# Altium PCB SAMV71_Xplained_Ultra.PcbDoc (part 3 of 9)
Units mm, origin at the board's own origin, x right, y up, seen from the top; angles counter-clockwise.
Board outline 90 x 135 mm, 8 copper layers (Top Layer LF-Signals, Ground Plane 1 (GND), Power Plane (VCC), Ground Plane 2 (GND), Signal Layer 1, Signal Layer 2, Ground Plane 3 (GND), Bottom Layer LF-Signals), stack 1.632 mm thick; 483 components, 411 nets, 1994 pads, 1021 vias.
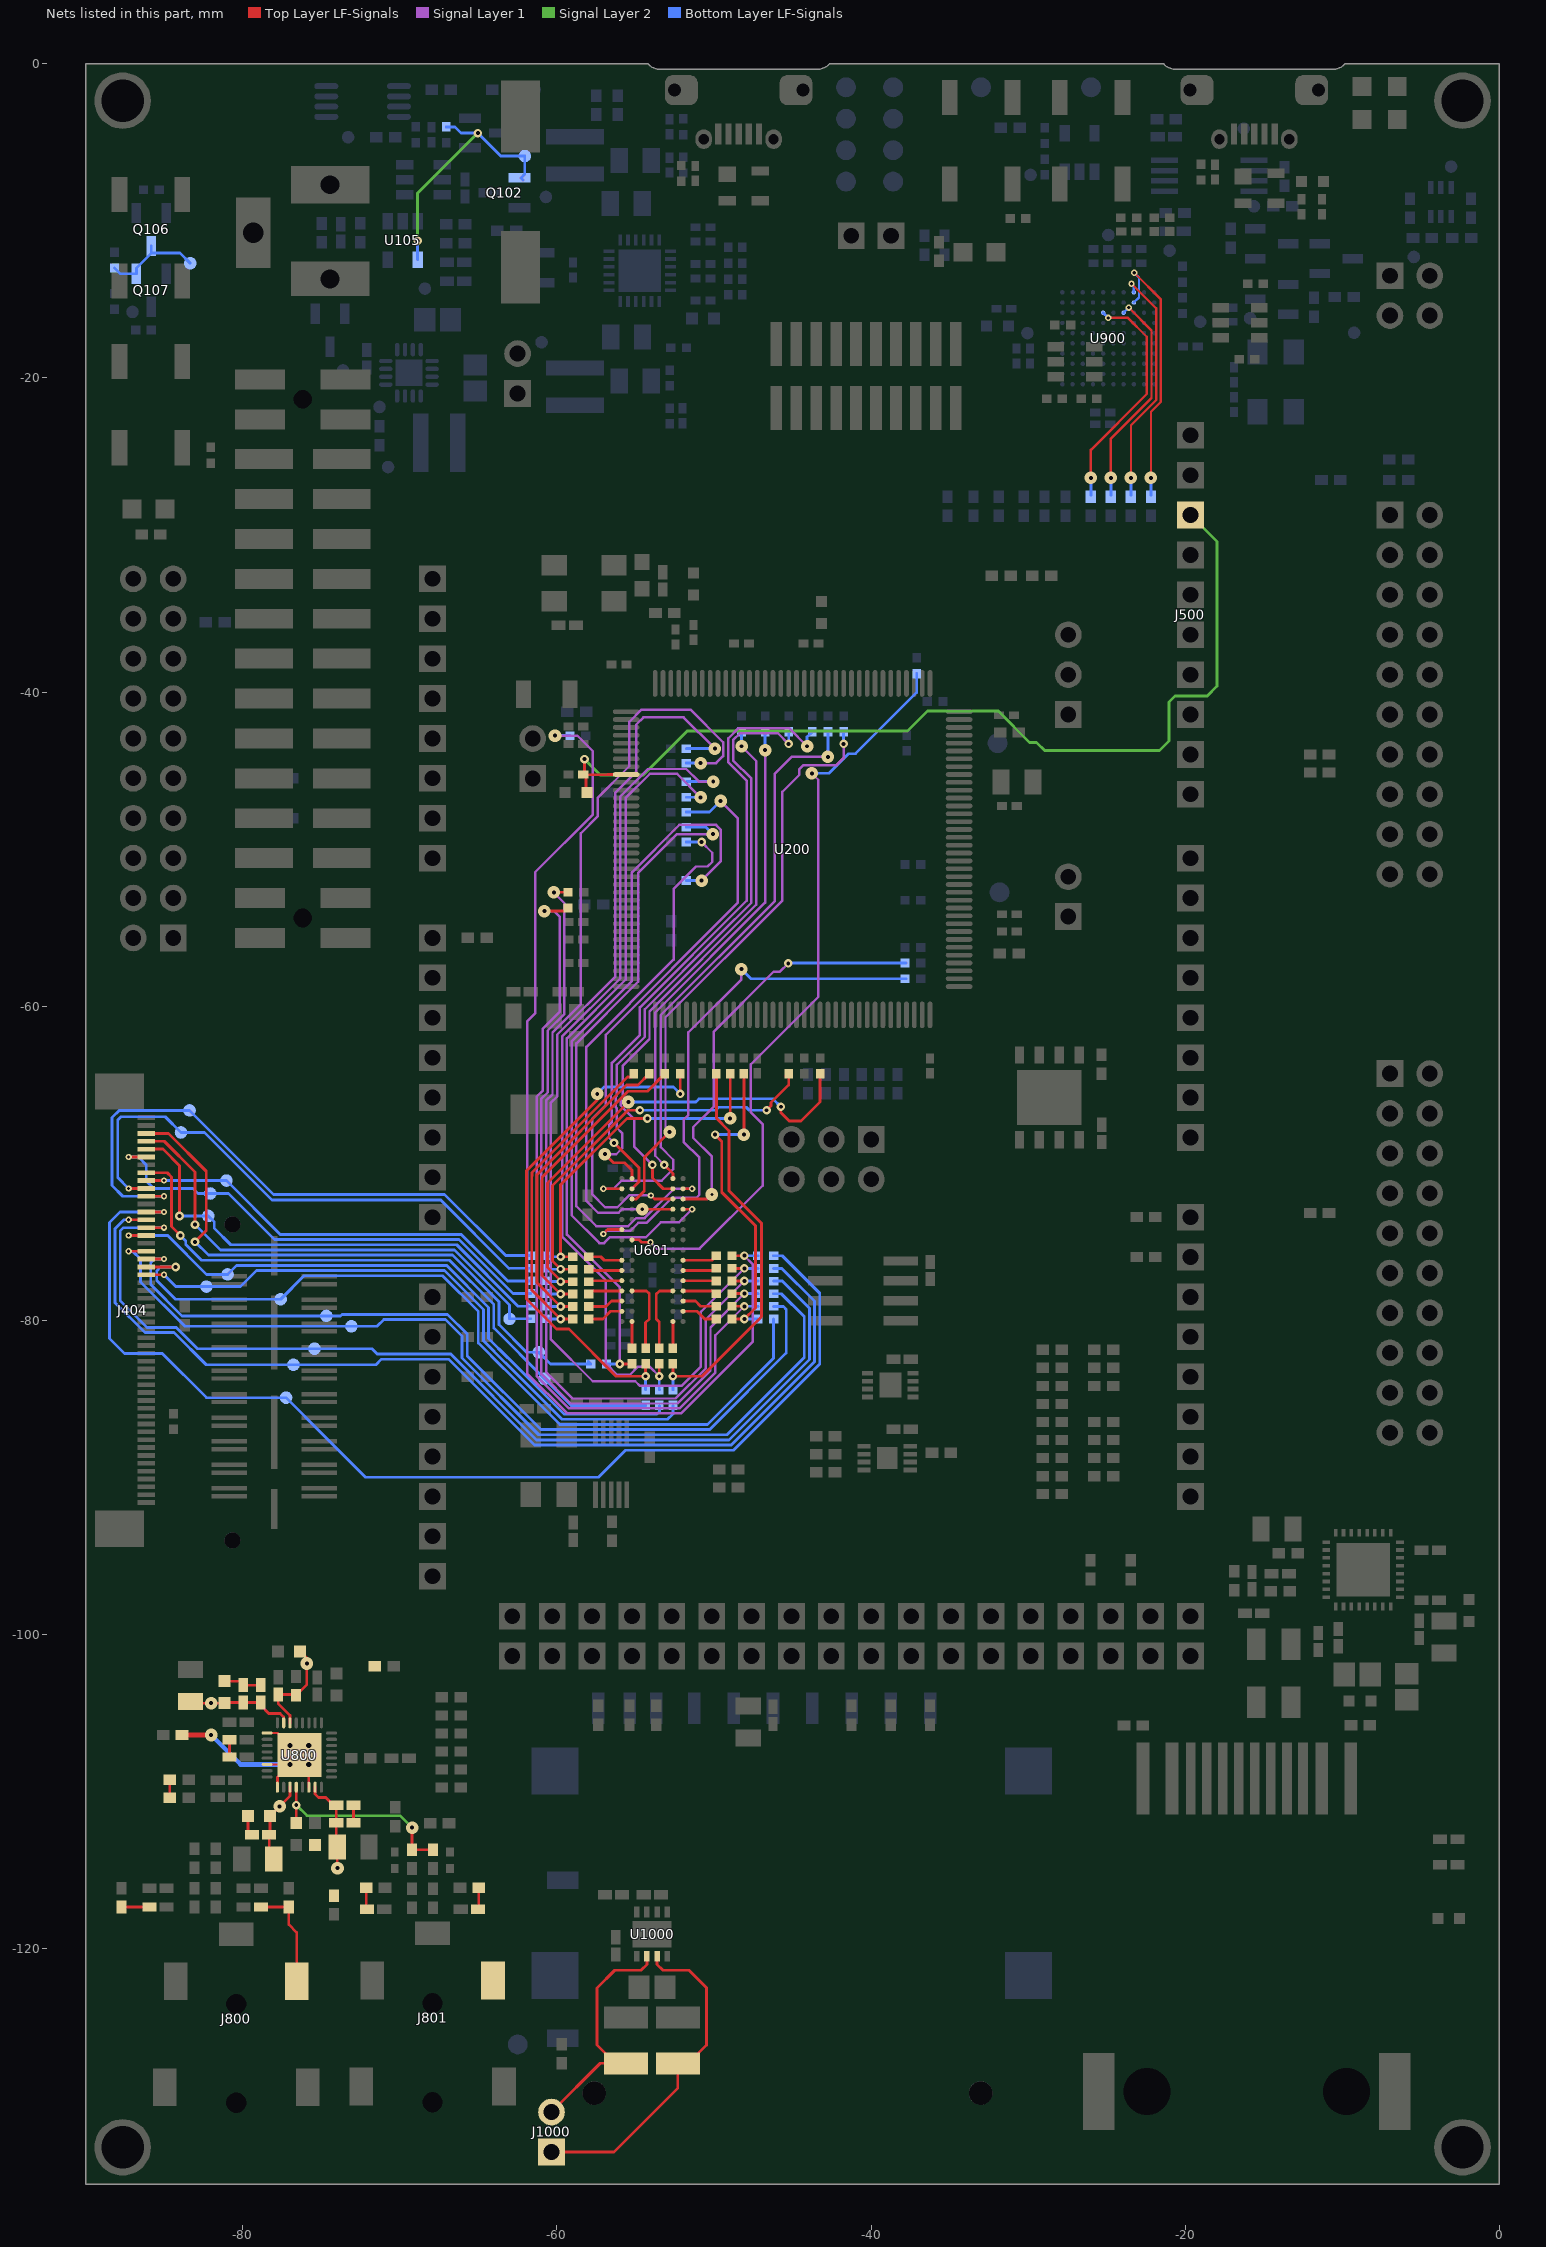
[diagram p9: the nets of this part, all layers, seen from the top]

## Part data (continued)
C219 C902: library part A01-0015, "Ceramic capacitor, SMD 0402, NP0, 50V, +/-5%", Manufacturer=AVX, MPN=04025A100JAT2A, TemperatureRange="-55 - +125 deg C", Tolerance="50V, +/-5%", AN=A01-0015, Height=0,550000011920929, PartGroup="Capacitors,Ceramic,SMD 0402"
C300 C301: library part A01-0011, "Ceramic capacitor, SMD 0402, NP0, 50V, +/-0.25pF", Manufacturer="YAGEO CORP", MPN=CC0402CRNPO9BN4R7, TemperatureRange="-55 - +125 deg C", Tolerance="50V, +/-0.25pF", AN=A01-0011, Height=0,550000011920929, PartGroup="Capacitors,Ceramic,SMD 0402"
C302 C303: library part A01-0016, "Ceramic capacitor, SMD 0402, NP0, 50V, +/-5%", Manufacturer=Kemet, MPN=C0402C120J5GAC7867, TemperatureRange="-55 - +125 deg C", Tolerance="50V, +/-5%", AN=A01-0016, Height=0,550000011920929, PartGroup="Capacitors,Ceramic,SMD 0402"
C304 C903: library part A01-0046, "Ceramic capacitor, SMD 0402, X7R, 25V, +/-10%", Manufacturer=PHYCOMP, MPN="2238 587 15632", TemperatureRange="-55 - +125 deg C", Tolerance="25V, +/-10%", AN=A01-0046, Height=0,550000011920929, PartGroup="Capacitors,Ceramic,SMD 0402"
C704 C709 C800 C900 C901: library part A01-0019, "Ceramic capacitor, SMD 0402, NP0, 50V, +/-5%", Manufacturer="YAGEO CORP", MPN=CC0402JRNPO9BN220, TemperatureRange="-55 - +125 deg C", Tolerance="50V, +/-5%", AN=A01-0019, Height=0,550000011920929, PartGroup="Capacitors,Ceramic,SMD 0402"
C803 C804 C812 C813: library part A01-0034, "Ceramic capacitor, SMD 0402, X7R, 50V, +/-10%", Manufacturer=Murata, MPN=GRM155R71H471KA01D, TemperatureRange="-55 - +125 deg C", Tolerance="50V, +/-10%", AN=A01-0034, Height=0,550000011920929, PartGroup="Capacitors,Ceramic,SMD 0402"
C814 C815: library part A01-0347, "Ceramic capacitor, SMD 0402, X5R, 6.3V, +/-20% (de33687)", Manufacturer=Murata, MPN=GRM155R60J475ME87D, TemperatureRange="-55°C to +85°C", Tolerance=+-20%, AN=A01-0347, Height=0,5, PartGroup="Capacitors,Ceramic,SMD 0402"
C823 C824: library part A01-0022, "Ceramic capacitor, SMD 0402, NP0, 50V, +/-5%", TemperatureRange="-55 - +125 deg C", Tolerance="50V, +/-5%", AN=A01-0022, Height=0,550000011920929, PartGroup="Capacitors,Ceramic,SMD 0402"
C827 C906 C907 C908: library part A01-0321, "Ceramic capacitor, SMD 0402, C0G, 50V, +/-5%", Manufacturer=Murata, MPN=GRM1555C1H102JA01D, Tolerance=5%, AN=A01-0321, Height=0,550000011920929, PartGroup="Capacitors,Ceramic,SMD 0402"
C1000: library part A01-0400, "Ceramic capacitor, SMD 0805, X5R, 25V, ±10 %", Manufacturer=Murata, MPN=GRM21BR61E475KA12L, Tolerance=±10%, AN=A01-0400, Height=1,25, PartGroup="Capacitors,Ceramic,SMD 0805"
D100: library part A04-0064, "Schottky double Diodes, NXP, SOT23-3", Manufacturer=NXP, MPN=BAT54C, AN=A04-0064, Height=1, PartGroup=Diodes,Schottky
D101: library part A04-0001, "Schottky diode, V(rrm)=30V, I(f)=0.1A, V(f)=0.4V (at If = 0.01A), I(r)=0.5uA (at Vrrm), t(rr)=5ns, SMD SOT23", Manufacturer=Philips, MPN=BAT54, TemperatureRange="-40 - +85 deg C", AN=A04-0001, Height=1,10000002384186, NC=2, PartGroup=Diodes,Schottky
D300 D301 D901: library part A10-0019, "LED, Yellow, Wave length=591nm, SMD 0805, ±70°", Manufacturer=Everlight, MPN=17-21UYC/S530-A3/TR8, TemperatureRange="-40 to +85 deg C", AN=A10-0019, Height=1,10000002384186, PartGroup=Opto,LEDs,SMD
D302 D902: library part A06-0236, "Double rail-to-rail USB ESD protection diode", Manufacturer=NXP, MPN=PRTR5V0U2X, TemperatureRange="-40 to +85 C", AN=A06-0236, Height=1,10000002384186, PartGroup="Integrated Circuits,Special function,Protection", PartType=Buy
D900: library part A10-0018, "LED, Green, Wave length=575nm, SMD 0805, ±70°", Manufacturer=Everlight, MPN=EL17-21SYGC, TemperatureRange="-40 - +85 deg C", AN=A10-0018, Height=1,10000002384186, PartGroup=Opto,LEDs,SMD
E1 E2 E3 E4: library part A08-0053, "2.8mm adhesive feet,diam 8.0mm", Manufacturer=3M, MPN=SJ-5076, AN=A08-0053, Height=2,79999995231628, PartGroup="Mechanical devices,Mounting accessories"
J100: library part A08-2120, "Through hole DC jack 2.1mm, 12V, 3A", Manufacturer=Lumberg, MPN="NEB 21 R", TemperatureRange="-20°C to +70°C", AN=A08-2120, Height=11, PartGroup="Mechanical devices,Connectors,Power"
J101: library part A08-1519, "Pin header, 2x2, Right Angle, 2.54mm, THT, Pin In Paste", Manufacturer="Pro-data International Corp", MPN=P101-2*02RGF-139-ND, AN=A08-1519, Height=5,07999992370605, PartGroup="Mechanical devices,Connectors,Pin headers"
J102: library part A08-0764, "1x2 pin header, right angle, 2.54 mm pitch, through-hole", Manufacturer="Pro-data International Corp", MPN=2213R-2G, AN=A08-0764, Height=2,53999996185303, PartGroup="Mechanical devices,Connectors,Pin headers"
J103 J200 J201 J1000: library part A08-1754, "1x2 pin header, 2.54mm pitch, Pin-in-Paste THM", Manufacturer=SAMTEC, MPN=HMTSW-102-23-F-S-237, TemperatureRange="- 55 deg C to + 125 deg C", AN=A08-1754, Height=6,09999990463257, PartGroup="Mechanical devices,Connectors,Pin headers"
J202: library part A08-1799, "1x3 pin header, 2.54mm pitch, Pin-in-Paste THM, 1mm hole", Manufacturer=SAMTEC, MPN=HMTSW-103-23-F-S-237, AN=A08-1799, Height=6,09999990463257, PartGroup="Mechanical devices,Connectors,Pin headers"
J300 J301: library part A09-0783, "Default closed SMD strap, 0603 size", AN=A09-0783, Height=0, PartGroup="Mechanical devices,PCB implemented components"
J302 J900: library part A08-2112, "Micro USB AB Connector, Standard SMT + DIP", Manufacturer=HIROSE, MPN=ZX62D-AB-5P8(30), AN=A08-2112, Height=2,79999995231628, PartGroup="Mechanical devices,Connectors,USB"
J400: library part A08-2225, "Samtec TSM series, 2x15 pin header, straight, 2.54mm pitch SMD, locking leads.", Manufacturer=SAMTEC, MPN=TSM-115-01-L-DV-LC, TemperatureRange="-55°C to +125°C", AN=A08-2225, Height=9,64999961853027, PartGroup="Mechanical devices,Connectors,Pin headers"
J401 J402: library part A08-1513, "Pin header, 2x10, Right Angle, 2.54mm, THM, Pin In Paste", Manufacturer="Pro-data International Corp", MPN=P101-2*10RGF-139-ND, AN=A08-1513, PartGroup="Mechanical devices,Connectors,Pin headers"
J403: library part A08-2290, "SAMTEC FTSH series 50-mil header, shrouded, pin 7 removed, SMD", Manufacturer=SAMTEC, MPN=FTSH-110-01-F-DV-007-K, TemperatureRange="-55°C to +125°C", AN=A08-2290, Height=6,1100001335144, PartGroup="Mechanical devices,Connectors,Pin headers"
J404: library part A08-1886, "50 pin FPC connector, e=0.5mm, single side contact (top).", Manufacturer="TE Connectivity", MPN=5-1734839-0, TemperatureRange="-20°C to +85°C", AN=A08-1886, Height=2,04999995231628, PartGroup="Mechanical devices,Connectors,PCB - receptacle"
J405: library part A08-2204, "SAMTEC 0.5mm, 20-pair, High-Speed Differential Pair Socket", Manufacturer=SAMTEC, MPN=QSH-020-01-L-D-DP-A, AN=A08-2204, Height=3,04999995231628, PartGroup="Mechanical devices,Connectors,PCB - receptacle"
J406: library part A08-1801, "2x10 pin header, 2.54mm pitch, Pin-in-Paste THM, 1mm hole", Manufacturer=SAMTEC, MPN=HMTSW-110-23-F-D-237, AN=A08-1801, Height=6,09999990463257, PartGroup="Mechanical devices,Connectors,Pin headers"
J500: library part A08-2026, "1x10 receptacle pin header, low insertion force, 2.54mm pitch THM, Pin in Paste", Manufacturer=SAMTEC, MPN=SSQ-110-21-F-S, AN=A08-2026, Height=8,51000022888184, PartGroup="Mechanical devices,Connectors,Pin header receptacle"
J501 J502 J503 J504 J505: library part A08-2025, "1x8 receptacle pin header, low insertion force, 2.54mm pitch THM, Pin in Paste", Manufacturer=SAMTEC, MPN=SSQ-108-21-F-S, AN=A08-2025, Height=8,51000022888184, PartGroup="Mechanical devices,Connectors,Pin header receptacle"
J506: library part A08-1654, "2x3 pin header, 2.54mm pitch, Pin-in-Paste THM", Manufacturer=SAMTEC, MPN=HMTSW-103-23-F-D-237, TemperatureRange="- 55 �C to + 125 �C", AN=A08-1654, Height=6,09999990463257, PartGroup="Mechanical devices,Connectors,Pin headers"
J507: library part A08-0387, "2x18 female pin header, 2.54mm pitch, THM", Manufacturer=SAMTEC, MPN=SSQ-118-01-G-D, TemperatureRange="-55 - +125 degC", AN=A08-0387, Height=8,51000022888184, PartGroup="Mechanical devices,Connectors,Pin header receptacle"
J600: library part A08-0816, "SD/MMC socket, 2.7mm, push-push, SMD", Manufacturer=Kyocera-elco, MPN="KYOCERA - 14 5738 009 220 859+", TemperatureRange="-25 deg C to 90 deg C", AN=A08-0816, Height=2,70000004768372, PartGroup="Mechanical devices,Connectors,Memory cards"
J700: library part A08-1816, "10/100Base-TX, SMD, RJ45, green and yellow LEDs, integrated magnetics", Manufacturer="Wurth Elektronik", MPN=74980111211, TemperatureRange="-40°C to +85°C", AN=A08-1816, Height=13,6099996566772, PartGroup="Mechanical devices,Connectors,Other"
J800 J801: library part A08-0886, "3.5mm stereo phone jack", Manufacturer=Lumberg, MPN="1503 03", AN=A08-0886, Height=5, PartGroup="Mechanical devices,Connectors,Other"
JS100 JS101 JS200 JS201 JS202: library part A08-0543, "Jumper cap for 2.54mm pinheader", Manufacturer=SAMTEC, MPN=SNT-100-BK-G, AN=A08-0543, PartGroup="Mechanical devices,Mounting accessories,Other"
L100 L101 L102: library part A03-0197, "2.2µH Shielded Power Inductor, 4x4x2mm, Isat=5.6A , Irms=4.0A , DCR=35.2mΩ", Manufacturer=Coilcraft, MPN=XAL4020-222MEC, TemperatureRange="–40°C to +125°C", Tolerance=20%, AN=A03-0197, Height=2, PartGroup="Inductors,Power Inductors"
L200 L201 L202 L700 L701 L702 L900 L901: library part A03-0035, "SMD RF inductor 0603. Z=470Ohm (@100MHz), Max R(dc)=0.65Ohm, Max current=1A", Manufacturer=Murata, MPN=BLM18PG471SN1, TemperatureRange=-55, AN=A03-0035, Height=0,800000011920929, PartGroup=Inductors,EMI
L800 L801 L802 L803: library part A03-0142, "FERRITE CHIP 80 OHM 1500MA 0402", Manufacturer=Murata, MPN=BLM15PD800SN1, TemperatureRange="-55 ° C to +125 ° C", Tolerance=±25%, AN=A03-0142, Height=0,5, PartGroup=Inductors,EMI
L804 L805 L806: library part A03-0167, "SMD EMI FERRITE 0805, Z=120 ohm(@100MHz), Max R(dc)=0.03 ohm, Max current=3A, (Digikey:490-5986-2-ND)", Manufacturer=Murata, MPN=BLM21PG121SN1D, TemperatureRange="-55 to +125°C", AN=A03-0167, Height=0,899999976158142, PartGroup=Inductors,EMI
LABEL1: library part A09-0611, "PCBA identification label PP Top White Gloss", Manufacturer="ACT Logimark AS", MPN=505462, AN=A09-0611, PartGroup="Mechanical devices,Packaging materials,Printed Labels"
Q100: library part A05-0023, "P-ch. MOSFET. -30V, -3.0A continuous, -24A Peak. RDS(ON)=0.098Ohm@VGS=-10V, RDS(ON)=0.165Ohm@VGS=-4.5V, -2.5V<VGS(th)<-1.0V", Manufacturer="International Rectifier", MPN=IRLML5203PBF, TemperatureRange="-40C to +125", AN=A05-0023, Height=1,12000000476837, PartGroup="Transistors,Power FET,SMD"
Q101 Q108: library part A05-0040, "Dual N/P-ch MOSFET, 20V, 2.7A/-1.9A cont, 8A/-8A pulse, RDS(ON)<0.08/0.17Ohm@VGS=4.5V, VGS(th)<1.5/-1.5V, SSOT6", Manufacturer=Fairchild, MPN=FDC6327C, TemperatureRange="-55 - +150 deg C", AN=A05-0040, Height=1,10000002384186, PartGroup="Transistors,Power FET,SMD"
Q102: library part A05-0134, "P-channel Power MOSFET,30V, 520mA continuous drain current", Manufacturer=NXP, MPN=BSH202, AN=A05-0134, PartGroup="Transistors,Power FET,SMD"
Q103 Q104 Q106: library part A05-0087, "P-ch. MOSFET. -30V, -3.7A continuous,RDS(ON)=0.05Ohm@VGS=-4,5V, RDS(ON)=0.08Ohm@VGS=-2.5V", Manufacturer="International Rectifier", MPN=IRLML6402PBF, TemperatureRange="-55 - +150 deg C", AN=A05-0087, Height=1,14999997615814, PartGroup="Transistors,Power FET,SMD"
Q105 Q107: library part A05-0085, "N-Channel MOSFET. 60V, 0.300A continuous, 1.2A Peak. RDS(ON) = 3.8Ohm@VGS=4.5V, VGS(th)<2.5V", Manufacturer=NXP, MPN=2N7002,215, TemperatureRange="-65 to 150 deg C", AN=A05-0085, Height=1,10000002384186, PartGroup="Transistors,Small signal FET,SMD"
Q900: library part A05-0051, "Dual N-Channel MOSFET, 60V, 115mA cont,RDS(ON) < 7.5 Ohm @50mA@5V, SOT-363", Manufacturer=Fairchild, MPN=2N7002DW, TemperatureRange="-65 to 150 deg C", AN=A05-0051, Height=1,10000002384186, PartGroup="Transistors,Small signal FET,SMD"
R100 R920: library part A02-0163, "Thick film resistor, SMD 0402, 1/16W, 1%", Manufacturer=(n/a), MPN=RMCF0402ZT0R00, TemperatureRange="-55 - +125 deg C", Tolerance="1 %", AN=A02-0163, Height=0,349999994039536, PartGroup="Resistors,SMD,0402 1%"
R101 R106 R114 R120 R121 R126 R134 R137 R140 R141 R142 R143 R404 R604 R605 R607 R608 R609 R610 R702: library part A02-0260, "Thick film resistor, SMD 0402, 1/16W, 1%", Manufacturer=ASJ, MPN=CR10-1003-FK, TemperatureRange="-55� to +125�C", Tolerance="1 %", AN=A02-0260, Height=0,349999994039536, PartGroup="Resistors,SMD,0402 1%"
R102 R103 R119 R136 R306 R812 R813: library part A02-0252, "Thick film resistor, SMD 0402, 1/16W, 1%", Manufacturer=KOA, MPN=RK73H1ETTP4702F, TemperatureRange="-55 - +125 deg C", Tolerance="1 %", AN=A02-0252, Height=0,349999994039536, PartGroup="Resistors,SMD,0402 1%"
R104 R305: library part A02-0247, "Thick film resistor, SMD 0402, 1/16W, 1%", Manufacturer=ASJ, MPN=CR10-3002-FK, TemperatureRange="-55� to +155�C", Tolerance="1 %", AN=A02-0247, Height=0,349999994039536, PartGroup="Resistors,SMD,0402 1%"
R105 R116 R117 R127 R131 R135: library part A02-0276, "Thick film resistor, SMD 0402, 1/16W, 1%", Manufacturer=ASJ, MPN=CR10-4703-FK, TemperatureRange="-55 - +125 deg C", Tolerance="1 %", AN=A02-0276, Height=0,349999994039536, PartGroup="Resistors,SMD,0402 1%"
R107 R139 R302 R303 R307 R900 R904 R905 R907 R908 R910 R911 R912 R913 R914 R915 R921: library part A02-0200, "Thick film resistor, SMD 0402, 1/16W, 1%", Manufacturer=ASJ, MPN=CR10-3300-FK, TemperatureRange="-55 - +125 deg C", Tolerance="1 %", AN=A02-0200, Height=0,349999994039536, PartGroup="Resistors,SMD,0402 1%"
R108: library part A02-0204, "Thick film resistor, SMD 0402, 1/16W, 1%", Manufacturer=ASJ, MPN=CR10-4700-FK, TemperatureRange="-55 - +125 deg C", Tolerance="1 %", AN=A02-0204, Height=0,349999994039536, PartGroup="Resistors,SMD,0402 1%"
R109 R112 R200 R201 R202 R203 R207 R208 R209 R210 R211 R213 R215 R216 R217 R218 R219 R220 R221 R222 R223 R224 R225 R226 R228 R229 R230 R234 R400 R401 R402 R403 R800 R802 R806 R811 R814 R815 R816 R818 R819: library part A02-0163, "RES 0.0 OHM 1/16W 0402 SMD", Manufacturer=(n/a), MPN=RMCF0402ZT0R00, TemperatureRange="-55 - +125 deg C", Tolerance="1 %", AN=A02-0163, Height=0,349999994039536, PartGroup="Resistors,SMD,0402 1%"
R110 R204 R205 R206 R212 R214 R227 R300 R301 R817 R916 R917: library part A02-0178, "Thick film resistor, SMD 0402, 1/16W, 1%", Manufacturer=ASJ, MPN=CR10-39R0-FK, TemperatureRange="-55 - +125 deg C", Tolerance="1 %", AN=A02-0178, Height=0,349999994039536, PartGroup="Resistors,SMD,0402 1%"
R111 R122: library part A02-0925, "Thick film resistor, SMD 0402, 1/16W, 1%", TemperatureRange="-55 - +125 deg C", Tolerance="1 %", AN=A02-0925, Height=0,349999994039536, PartGroup="Resistors,SMD,0402 1%"
R113 R304 R906 R909 R919: library part A02-0284, "Thick film resistor, SMD 0402, 1/16W, 1%", Manufacturer=ASJ, MPN=CR10-1004-FK, TemperatureRange="-55 - +125 deg C", Tolerance="1 %", AN=A02-0284, Height=0,349999994039536, PartGroup="Resistors,SMD,0402 1%"
R115: library part A02-0250, "Thick film resistor, SMD 0402, 1/16W, 1%", Manufacturer=ASJ, MPN=CR10-3902-FK, TemperatureRange="-55 - +125 deg C", Tolerance="1 %", AN=A02-0250, Height=0,349999994039536, PartGroup="Resistors,SMD,0402 1%"
R118: library part A02-0202, "Thick film resistor, SMD 0402, 1/16W, 1%", Manufacturer=ASJ, MPN=CR10-3900-FK, TemperatureRange="-55 - +125 deg C", Tolerance="1 %", AN=A02-0202, Height=0,349999994039536, PartGroup="Resistors,SMD,0402 1%"
R123: library part A02-0264, "Thick film resistor, SMD 0402, 1/16W, 1%", Manufacturer=ASJ, MPN=CR10-1503-FK, TemperatureRange="-55 - +125 deg C", Tolerance="1 %", AN=A02-0264, Height=0,349999994039536, PartGroup="Resistors,SMD,0402 1%"
R124: library part A02-0278, "Thick film resistor, SMD 0402, 1/16W, 1%", TemperatureRange="-55 - +125 deg C", Tolerance="1 %", AN=A02-0278, Height=0,349999994039536, PartGroup="Resistors,SMD,0402 1%"
R125 R133: library part A02-0267, "Thick film resistor, SMD 0402, 1/16W, 1%", Manufacturer=ASJ, MPN=CR10-2003-FK, TemperatureRange="-55 - +125 deg C", Tolerance="1 %", AN=A02-0267, Height=0,349999994039536, PartGroup="Resistors,SMD,0402 1%"
R128: library part A02-0923, "Thick film resistor, SMD 0402, 1/16W, 1%", TemperatureRange="-55 - +125 deg C", Tolerance="1 %", AN=A02-0923, Height=0,349999994039536, PartGroup="Resistors,SMD,0402 1%"
R129 R600 R601 R602 R603 R606 R611 R612: library part A02-0236, "Thick film resistor, SMD 0402, 1/16W, 1%", Manufacturer=vishay, MPN=CRCW040210K0FKED, TemperatureRange="-55 - +125 deg C", Tolerance="1 %", AN=A02-0236, Height=0,349999994039536, PartGroup="Resistors,SMD,0402 1%"
R130: library part A02-0927, "Thick film resistor, SMD 0402, 1/16W, 1%", Manufacturer=PHYCOMP, MPN=232270672324L, TemperatureRange="-55°C to +150°C", Tolerance="1 %", AN=A02-0927, Height=0,349999994039536, PartGroup="Resistors,SMD,0402 1%"
R132: library part A02-0924, "Thick film resistor, SMD 0402, 1/16W, 1%", TemperatureRange="-55 - +125 deg C", Tolerance="1 %", AN=A02-0924, Height=0,349999994039536, PartGroup="Resistors,SMD,0402 1%"
R138: library part A02-0266, "Thick film resistor, SMD 0402, 1/16W, 1%", Manufacturer=ASJ, MPN=CR10-1803-FK, TemperatureRange="-55 - +125 deg C", Tolerance="1 %", AN=A02-0266, Height=0,349999994039536, PartGroup="Resistors,SMD,0402 1%"
R231 R232 R700 R706 R901 R902 R903: library part A02-0212, "Thick film resistor, SMD 0402, 1/16W, 1%", Manufacturer=ASJ, MPN=CR10-1001-FK, TemperatureRange="-55 - +125 deg C", Tolerance="1 %", AN=A02-0212, Height=0,349999994039536, PartGroup="Resistors,SMD,0402 1%"
R233: library part A02-0929, "Thick film resistor, SMD 0402, 1/16W, 1%", TemperatureRange="-55 - +125 deg C", Tolerance="1 %", AN=A02-0929, Height=0,349999994039536, PartGroup="Resistors,SMD,0402 1%"
R235 R236 R237 R238 R239 R240 R241 R242 R243 R244 R245 R246 R247 R248 R249 R250 R251 R252 R253 R254 R255 R256 R257 R258 R259 R260 R261 R262 R263 R264 R265 R266 R267 R268 R269 R270 R801: library part A02-0172, "Thick film resistor, SMD 0402, 1/16W, 1% (de23607)", Manufacturer=Samsung, MPN=RC100SF22R0CS, TemperatureRange="-55 - +125 deg C", Tolerance="1 %", AN=A02-0172, Height=0,349999994039536, PartGroup="Resistors,SMD,0402 1%"
R613 R614 R615 R616 R617 R618 R619 R620 R621 R622 R623 R624 R625 R626 R627 R628: library part A02-0195, "Thick film resistor, SMD 0402, 1/16W, 1%", TemperatureRange="-55 - +125 deg C", Tolerance="1 %", AN=A02-0195, Height=0,349999994039536, PartGroup="Resistors,SMD,0402 1%"
R629 R630 R631 R632 R633 R634 R635 R636 R637 R638 R639 R640 R641 R642 R643 R644: library part A02-0176, "Thick film resistor, SMD 0402, 1/16W, 1%", Manufacturer=ASJ, MPN=CR10-33R0-FK, TemperatureRange="-55 - +125 deg C", Tolerance="1 %", AN=A02-0176, Height=0,349999994039536, PartGroup="Resistors,SMD,0402 1%"
R701 R703: library part A02-0196, "Thick film resistor, SMD 0402, 1/16W, 1%", Manufacturer=ASJ, MPN=CR10-2200-FK, TemperatureRange="-55 - +125 deg C", Tolerance="1 %", AN=A02-0196, Height=0,349999994039536, PartGroup="Resistors,SMD,0402 1%"
R704: library part A02-0914, "Thick film resistor, SMD 0402, 1/16W, 1%, E192", TemperatureRange="-55 to +125 deg C", Tolerance=1%, AN=A02-0914, Height=0,349999994039536, PartGroup="Resistors,SMD,0402 1%"
R705 R707 R708 R709 R710 R711 R712 R713 R714 R715 R716 R717 R718 R719 R720: library part A02-0228, "Thick film resistor, SMD 0402, 1/16W, 1%", Manufacturer=PHYCOMP, MPN="2322 706 74702L", TemperatureRange="-55� to +125�C", Tolerance="1 %", AN=A02-0228, Height=0,349999994039536, PartGroup="Resistors,SMD,0402 1%"
R803 R804: library part A02-0220, "Thick film resistor, SMD 0402, 1/16W, 1%", Manufacturer=ASJ, MPN=CR10-2201-FK, TemperatureRange="-55 - +125 deg C", Tolerance="1 %", AN=A02-0220, Height=0,349999994039536, PartGroup="Resistors,SMD,0402 1%"
R807 R808 R809 R810: library part A02-0171, "Thick film resistor, SMD 0402, 1/16W, 1%", Manufacturer=vishay, MPN=CRCW040220R0FKED, TemperatureRange="-55 - +125 deg C", Tolerance="1 %", AN=A02-0171, Height=0,349999994039536, PartGroup="Resistors,SMD,0402 1%"
R918: library part A02-0539, "Thick film resistor, SMD 0402, 1/16W, 1%", Manufacturer=vishay, MPN=CRCW04026K81FKED, TemperatureRange="-55 - +125 deg C", Tolerance=1%, AN=A02-0539, Height=0,349999994039536, PartGroup="Resistors,SMD,0402 1%"
R1000 R1001: library part A02-0760, "Thick film resistor, SMD 1210, 0.5W, 1%", Manufacturer=vishay, MPN=CRCW121062R0FKEAHP, TemperatureRange="-55°C to +155°C", Tolerance=1%, AN=A02-0760, Height=0,699999988079071, PartGroup="Resistors,SMD,1210 1%"
SW100 SW101 SW300 SW301: library part A08-0790, "6.2x6.2 mm SMD tact switch, same as A08-0091 but less force is needed", Manufacturer=ALPS, MPN=SKRAAKE010, TemperatureRange="-30 - +90 deg C", AN=A08-0790, Height=5,09999990463257, PartGroup="Mechanical devices,Switches,SMD"
TP100 TP200 TP201 TP300 TP600 TP900 TP901 TP902 TP903 TP904 TP905 TP906 TP907: library part A08-0004, "Single SMD testpad", AN=A08-0004, Height=0, PartGroup="Mechanical devices,Connectors,Test points"
U100: library part A06-1167, "5V to 17V in, 5V 2A out, Step-Down Converter", Manufacturer="Texas Instruments", MPN=TPS62143RGTR, TemperatureRange="-40C to 85C", AN=A06-1167, Height=1, PartGroup="Integrated Circuits,Regulators,Switched"
U101: library part A06-1100, "Backup battery supervisors for RAM retention", Manufacturer="Texas Instruments", MPN=TPS3619-33DGK, AN=A06-1100, PartGroup="Integrated Circuits,Special function,Supervisor"
U102: library part A06-0068, "Autoswitching 2:1 Power Mux", Manufacturer="Texas Instruments", MPN=TPS2113PWR, TemperatureRange="-40 - + 125 deg C", AN=A06-0068, Height=1,20000004768372, PartGroup="Integrated Circuits,General linear,Analog switch, bus switch and MUX"
U103: library part A06-1087, "Single channel power switch, 1A, reverse block, active low enabled.", Manufacturer=ST, MPN=STMPS2161STR, TemperatureRange="-40°C to +85°C", Tolerance="2.7 to 5.5V", AN=A06-1087, Height=1,45000004768372, PartGroup="Integrated Circuits,General linear,Analog switch, bus switch and MUX"
U104: library part A06-1165, "Externally Programmable Dual High-Current Step-Down DC/DC and Dual Linear Regulators", Manufacturer="Texas Instruments", MPN=LM26480SQ-AA/NOPB, TemperatureRange="-40C to 85C", AN=A06-1165, Height=0,800000011920929, PartGroup="Integrated Circuits,Regulators,Switched"
U105: library part A06-1239, "Single, Low Voltage (1.6-5.5V), Low Power (0.35µA), low cost", Manufacturer=ROHM, MPN=BU7411SG-TR, TemperatureRange="-40°C to +105°C", AN=A06-1239, Height=1,25, PartGroup="Integrated Circuits,General linear,OP-AMP"
U106: library part A06-1104, "1.65V to 5.5V SPDT Analog switch", Manufacturer="Texas Instruments", MPN=TS5A3160DBVR, AN=A06-1104, PartGroup="Integrated Circuits,General linear,Analog switch, bus switch and MUX"
U200: library part A06-1541, "SAM 32-bit ARM Cortex-M* RISC MCU, SAMV71B Series, QFP144", Manufacturer=MICROCHIP, MPN=ATSAMV71Q21B-AAB, TemperatureRange="-40°C to +105°C", AN=A06-1541, Height=1,60000002384186, PartGroup="Integrated Circuits,MCU, MPU, DSP,ARM MCU"
U600: library part A06-1169, "2kbit I2C EEPROM, single EUI-48 MAC, 1.7-5.5V, 2x3mm UDFN (8MA2)", Manufacturer=ATMEL, MPN=AT24MAC402-MAHM-T, TemperatureRange="–40°C to +85°C", AN=A06-1169, Height=0,600000023841858, PartGroup="Integrated Circuits,Memory,EEPROM"
U601: library part A06-1472, "16Mbit  SDRAM (512K Words x 16 Bits x 2 Banks), 143 MHz 3,3V", Manufacturer=ISSI, MPN=IS42S16100H-7BLI, TemperatureRange="-40C to +85C", AN=A06-1472, Height=1,20000004768372, PartGroup="Integrated Circuits,Memory,SDRAM"
U602: library part A06-1181, "Secure authentication and product validation device, EEPROM, I2C, 2.0 - 5.5V, UDFN8", Manufacturer=ATMEL, MPN=ATECC108-MAHDA-T, TemperatureRange="-40°C to +85°C", AN=A06-1181, Height=0,600000023841858, PartGroup="Integrated Circuits,Special function,Encryption"
U603: library part A06-1182, "Secure authentication and product validation device, EEPROM, I2C, 2.0 - 5.5V, SOIC8", Manufacturer=ATMEL, MPN=ATECC108-SSHDA-T, TemperatureRange="-40°C to +85°C", AN=A06-1182, Height=1,75, PartGroup="Integrated Circuits,Special function,Encryption"
U604: library part A06-1162, "16 Mbit (2MB) SPI Quad I/O flash, 3.3V, 108MHz, WSON-8, industrial temperature", Manufacturer=Spansion, MPN=S25FL116K0XNFI013, TemperatureRange="-40°C to +85°C", AN=A06-1162, Height=0,800000011920929, PartGroup="Integrated Circuits,Memory,FLASH"
U700: library part A06-1490, "10Base-T/100Base-TX PHY, RMII, EEE, 50MHz clock output", Manufacturer=Microchip, MPN=KSZ8061RNBW, TemperatureRange="-40°C to +105°C", AN=A06-1490, Height=0,850000023841858, PartGroup="Integrated Circuits,Interface ICs,Ethernet"
U800: library part A06-1156, "Ultra Low Power Codec for Portable Audio Applications", Manufacturer="Wolfson microelectronics", MPN=WM8904CGEFL/RV, TemperatureRange="-40C to +85C", AN=A06-1156, Height=0,800000011920929, PartGroup="Integrated Circuits,Special function,Mixed signal"
U801: library part A06-1177, "Programmable Phase-Locked Loop Clock Generator", Manufacturer="CIRRUS LOGIC", MPN=CS2100CP-CZZR, TemperatureRange="-10°C to +70°C", AN=A06-1177, Height=1,10000002384186, PartGroup="Integrated Circuits,Special function,Oscillator"
U900: library part A06-0736, "AVR 32-bit RISC MCU", Manufacturer=ATMEL, MPN=AT32UC3A4256J-C1UR, TemperatureRange="-40 to +85 deg C", AN=A06-0736, Height=1, PartGroup="Integrated Circuits,MCU, MPU, DSP,AVR MCU"
U1000: library part A06-1172, "5Mbit/s CAN Trasceiver,VCC = 5V, VIO = 2.8-5V, 3x3 mm VDFN8", Manufacturer=ATMEL, MPN=ATA6561-GBQW, AN=A06-1172, Height=0,899999976158142, PartGroup="Integrated Circuits,Interface ICs,CAN"
XC300: library part A07-0052, "32k768 crystal, +-20ppm, CL=7pF, max ESR 60kOhm, SMD", Manufacturer="Micro Crystal", MPN="MS1V-T1K 32.768kHz 7pF +/-20PPM TA", TemperatureRange="-40 /+85", Tolerance="+/- 20 PPM", AN=A07-0052, Height=2,07999992370605, PartGroup="Frequency devices,Crystals,SMD"
XC301 XC800 XC900: library part A07-0042, "Fox FQ5032B 12.0MHz SMD crystal 738B-12", Manufacturer="Fox  Electronics", MPN=FQ5032B-12.000, TemperatureRange="0°C ~ 70°C", Tolerance=±30ppm, AN=A07-0042, Height=1,20000004768372, PartGroup="Frequency devices,Crystals,SMD"
XC700: library part A07-0088, "25.000 MHz crystal, 18pF, ±30ppm, 5.0 x 3.2 mm", Manufacturer="TXC Corporation", MPN=7B-25.000MAAJ-T, TemperatureRange="-40°C to +85°C", Tolerance=±30ppm, AN=A07-0088, Height=1,04999995231628, PartGroup="Frequency devices,Crystals,SMD"

## Free pads (board coordinates)
  round 0.8 smd far side: 0(-62.05,-5.875) 0(-61.425,-1.65) 0(-60.707,-8.48) 1(-68.411,-14.313) 1(-60.982,-17.73) 2(-73.625,-19.525) 3(-73.3,-4.675) 667(-77.252,-84.924) 668(-76.78,-82.827) 669(-75.436,-81.807) 670(-73.09,-80.379) 671(-74.687,-79.715) 672(-77.591,-78.658) 674(-82.325,-77.853) 676(-80.967,-77.076) 677(-83.392,-66.634) 678(-83.939,-68.039) 679(-81.05,-71.1) 680(-82.075,-71.925) 681(-82.203,-73.353) 685(-60.797,-83.723) 686(-61.162,-82.034) 687(-63.02,-79.905)
  round 0.8 smd far side paste-1: 3(-87.025,-15.8) 3(-83.35,-12.7) 3(-71.3,-21.85) 3(-70.75,-25.675) 3(-30.05,-17.15) 3(-29.85,-7.075) 3(-24.9,-10.9) 3(-21,-11.9) 3(-19.05,-16.425) 3(-16.275,-4.125) 3(-15.875,-16.2) 3(-15.625,-9.075) 3(-9.25,-17.125) 3(-5.45,-12.3) 3(-3.075,-6.55)
  round 3.6 hole 2.7 paste-2.6: 666(-87.65,-132.65) 666(-87.65,-2.35) 666(-2.35,-132.65) 666(-2.35,-2.35)

## Via types
v1: diameter 0.55, hole 0.25, Top Layer LF-Signals to Bottom Layer LF-Signals, 546 vias
v2: diameter 0.55, hole 0.25, Top Layer LF-Signals to Bottom Layer LF-Signals, tented both sides, 190 vias
v3: diameter 0.55/0.55/0.55/0.8 (per signal layer), hole 0.25, Top Layer LF-Signals to Bottom Layer LF-Signals, tented top, 179 vias
v4: diameter 0.4, hole 0.2, Top Layer LF-Signals to Bottom Layer LF-Signals, 40 vias
v5: diameter 0.55, hole 0.25, Top Layer LF-Signals to Bottom Layer LF-Signals, tented top, 24 vias
v6: diameter 0.4, hole 0.2, Top Layer LF-Signals to Bottom Layer LF-Signals, tented both sides, 16 vias
v7: diameter 0.7, hole 0.35, Top Layer LF-Signals to Bottom Layer LF-Signals, 9 vias
v8: diameter 0.4/0.4/0.4/0.8 (per signal layer), hole 0.2, Top Layer LF-Signals to Bottom Layer LF-Signals, tented top, 6 vias
v9: diameter 0.4, hole 0.2, Top Layer LF-Signals to Bottom Layer LF-Signals, tented top, 5 vias
v10: diameter 0.66, hole 0.33, Top Layer LF-Signals to Bottom Layer LF-Signals, tented top, 4 vias
v11: diameter 0.55/0.55/0.55/0.8 (per signal layer), hole 0.25, Top Layer LF-Signals to Bottom Layer LF-Signals, 2 vias

## Nets (pads, with @x,y where several pads share a name; then routed paths per layer and width w, separated by ;. In a path a pad name is that pad's centre, name@x,y a point inside that pad or via, vN(x,y) a via of type N, cw(c..) or ccw(c..) an arc to the next point about the centre after c; other vN are vias at no path point)
A0/NBS0: R267.2 U601.J6 | length 48.7
  Top Layer LF-Signals w0.179: U601.J6@-55.222,-74.875 -54.766,-74.875 -54.616,-75.025 v4(-54.05,-75.025)
  Signal Layer 1 w0.155: v4(-54.05,-75.025) -53.638,-75.437 -50.915,-75.437 -46.908,-71.429 -46.908,-67.509 -47.658,-66.759 -47.658,-63.698 -43.37,-59.411 -43.37,-45.579 v3(-43.776,-45.173) v3@-43.776,-45.153
  Bottom Layer LF-Signals w0.179: v3(-43.776,-45.173) -42.673,-45.173 -41.423,-43.923 -41.002,-43.923 -37.1,-40.02 R267.2@-37.1,-38.825
A2: R251.2 U601.N6 | length 36.9
  Top Layer LF-Signals w0.179: U601.N6@-55.222,-72.275 -54.958,-72.275 -54.446,-71.763 -54.446,-69.964 -54.439,-69.958 -54.439,-69.62 v3(-52.827,-68.008)
  Signal Layer 1 w0.155: v3(-52.827,-68.008) -53.093,-67.743 -53.093,-60.705 -45.649,-53.261 -45.649,-46.348 -44.567,-45.266 -44.567,-44.906 -44.316,-44.655 -42.197,-44.655 -41.75,-44.208 v1(-41.75,-43.302)
  Bottom Layer LF-Signals w0.179: v1(-41.75,-43.302) R251.2@-41.75,-42.526
A3: R252.2 U601.P7 | length 40.1
  Top Layer LF-Signals w0.179: v4(-57.05,-71.625) U601.P7@-55.872,-71.625
  Signal Layer 1 w0.155: v4(-57.05,-71.625) -56.395,-71.625 -55.877,-71.107 -53.333,-71.107 -52.597,-70.371 -52.597,-69.772 -53.398,-68.972 -53.398,-60.57 -46.128,-53.3 -46.128,-45.187 -45.066,-44.125 v3(-42.75,-44.125)
  Bottom Layer LF-Signals w0.179: v3(-42.75,-44.125) R252.2@-42.75,-42.526
A4: R253.2 U601.P6 | length 40.6
  Top Layer LF-Signals w0.179: v1(-56.368,-68.697) -54.775,-70.29 -54.775,-71.178 U601.P6@-55.222,-71.625
  Signal Layer 1 w0.155: v1(-56.368,-68.697) -56.69,-68.375 -56.69,-67.573 -56.5,-67.383 -56.5,-66.623 -56.563,-66.561 -56.563,-65.639 -56.5,-65.577 -56.5,-63.613 -54.72,-61.833 -54.72,-60.079 -47.931,-53.289 -47.931,-45.635 -49.09,-44.476 -49.09,-42.937 -48.47,-42.317 -45.208,-42.317 v3(-44.075,-43.45)
  Bottom Layer LF-Signals w0.179: v3(-44.075,-43.45) -44.075,-42.851 R253.2@-43.75,-42.526
A5: R254.2 U601.R6 | length 38.9
  Top Layer LF-Signals w0.179: v3(-56.95,-69.422) -56.408,-69.964 -55.699,-69.964 -55.222,-70.441 U601.R6@-55.222,-70.975
  Signal Layer 1 w0.155: v3(-56.95,-69.422) -56.225,-69.422 -55.85,-69.047 -55.85,-68.081 -56.195,-67.736 -56.195,-66.497 -56.258,-66.434 -56.258,-65.766 -56.195,-65.703 -56.195,-63.74 -54.415,-61.96 -54.415,-60.205 -49.645,-55.435 -47.626,-53.416 -47.626,-45.509 -48.785,-44.35 -48.785,-43.063 -48.344,-42.622 -45.93,-42.622 v1(-45.25,-43.302)
  Bottom Layer LF-Signals w0.179: v1(-45.25,-43.302) R254.2@-45.25,-42.526
A6: R255.2 U601.R2 | length 31.8
  Top Layer LF-Signals w0.179: v1(-53.169,-70.102) -52.622,-70.649 U601.R2@-52.622,-70.975
  Signal Layer 1 w0.155: v1(-53.169,-70.102) -53.747,-69.524 -53.747,-60.399 -46.75,-53.403 v3(-46.75,-43.7)
  Bottom Layer LF-Signals w0.179: v3(-46.75,-43.7) R255.2@-46.75,-42.526
A7: R256.2 U601.P2 | length 34.7
  Top Layer LF-Signals w0.179: v1(-53.925,-70.102) -53.925,-70.934 -53.234,-71.625 U601.P2@-52.622,-71.625
  Signal Layer 1 w0.155: v1(-53.925,-70.102) -55.07,-68.956 -55.07,-67.212 -55.824,-66.459 -55.824,-66.437 -55.953,-66.308 -55.953,-65.892 -55.824,-65.763 -55.824,-63.8 -54.11,-62.086 -54.11,-60.332 -47.313,-53.534 -47.313,-44.387 v3(-48.25,-43.45) ; v3@-48.25,-43.325 v3@-48.227,-43.325
  Bottom Layer LF-Signals w0.179: v3@-48.25,-43.325 R256.2@-48.25,-42.526
A8: R257.2 U601.P1 | length 39.9
  Top Layer LF-Signals w0.179: U601.P1@-51.972,-71.625 v4(-51.397,-71.625)
  Signal Layer 1 w0.155: v4(-51.397,-71.625) -52.55,-71.625 -54.417,-73.492 -54.95,-73.492 -55.46,-74.002 -57.499,-74.002 -58.762,-72.739 -58.762,-62.366 -54.837,-58.441 -54.837,-51.517 -52.368,-49.047 -50.084,-49.047 v3(-50.081,-49.05)
  Bottom Layer LF-Signals w0.179: R257.2@-51.767,-48.6 -50.531,-48.6 v3(-50.081,-49.05)
A9: R258.2 U601.N2 | length 37.7
  Top Layer LF-Signals w0.179: v4@-54.031,-72.05 v4(-54.025,-72.05) -53.8,-72.275 U601.N2@-52.622,-72.275
  Signal Layer 1 w0.155: v4(-54.025,-72.05) -55.408,-72.05 -56.158,-72.8 -56.933,-72.8 -57.767,-71.967 -57.767,-67.177 -56.886,-66.297 -56.886,-61.814 -48.504,-53.432 -48.504,-48.017 v3(-49.587,-46.934)
  Bottom Layer LF-Signals w0.179: R258.2@-51.767,-47.641 -50.294,-47.641 v3(-49.587,-46.934)
A10: R259.2 U601.N1 | length 27.4
  Top Layer LF-Signals w0.179: U601.N1@-51.972,-72.275 -50.425,-72.275 v8(-50.139,-71.99) ; v1(-45.275,-57.275) v1@-45.25,-57.25
  Signal Layer 1 w0.155: v8(-50.139,-71.99) -50.139,-69.571 -51.328,-68.383 -51.328,-67.696 -50.01,-66.379 -50.01,-61.61 -46.201,-57.8 -45.8,-57.8 v1(-45.275,-57.275)
  Bottom Layer LF-Signals w0.179: v1(-45.275,-57.275) -45.251,-57.251 R259.2@-37.843,-57.251 R259.2@-37.771,-57.251
A11: R260.2 U601.M2 | length 33.8
  Top Layer LF-Signals w0.179: v8(-54.575,-72.925) U601.M2@-52.622,-72.925
  Signal Layer 1 w0.155: v8(-54.575,-72.925) -55.852,-72.925 -56.075,-73.147 -57.381,-73.147 -58.124,-72.404 -58.124,-62.59 -52.572,-57.039 -52.572,-52.534 -51.147,-51.108 -50.415,-51.108 -50.116,-50.809 -50.116,-50.228 v1(-50.794,-49.55)
  Bottom Layer LF-Signals w0.179: R260.2@-51.767,-49.55 v1(-50.794,-49.55)
ADVREF: C218.1 J500.8@-19.67,-28.73 L200.2 U200.9 | length 62.9
  Top Layer LF-Signals w0.18: v1(-58.25,-44.275) -58.25,-45.267 -56.789,-45.267 -56.772,-45.25 U200.9@-55.6,-45.25 ; L200.2@-58.15,-46.4 C218.1@-58.15,-45.35
  Signal Layer 2 w0.18: v1(-58.25,-44.275) -57.242,-45.283 -54.506,-45.283 -51.703,-42.48 -37.68,-42.48 -36.416,-41.216 -31.909,-41.216 -29.92,-43.205 -29.472,-43.205 -28.951,-43.726 -21.644,-43.726 -21.036,-43.118 -21.036,-40.636 -20.65,-40.25 -18.6,-40.25 -17.975,-39.625 -17.975,-30.425 J500.8@-19.67,-28.73
AUDIO_AVDD: C820.1 C821.1 L805.2 U800.23 | length 6.1
  Top Layer LF-Signals w0.175: U800.23@-75.4,-109.725 -75.4,-110.15 -75.175,-110.375 -74.725,-110.375 -74.225,-110.875 C821.1@-74.05,-110.875 C820.1@-74.05,-111.975 -74.05,-113.466 L805.2@-73.991,-113.525 -73.991,-114.816 -74,-114.825 -73.975,-114.85 v3(-73.975,-114.875)
AUDIO_CPVDD: C825.1 C826.1 C827.1 L806.2 U800.7 | length 6.4
  Top Layer LF-Signals w0.175: L806.2@-82.825,-104.266 -82.717,-104.374 C825.1@-81.175,-104.374 -81.126,-104.325 C826.1@-79.975,-104.325 C827.1@-78.85,-104.325 -78.85,-104.525 -78.35,-105.025 -77.624,-105.025 -77.4,-105.249 U800.7@-77.4,-105.625
  other v3: -82.025,-104.374
AUDIO_DCVDD: C828.1 C829.1 R819.2 U800.6 | length 6.5
  Top Layer LF-Signals w0.175: U800.6@-77,-105.625 -77,-105.15 -77.75,-104.4 C829.1@-77.75,-103.825 -76.675,-103.825 R819.2@-76.625,-103.875 -75.925,-103.175 -75.925,-101.502 C828.1@-76.352,-101.075
  other v3: -75.925,-101.85
AUDIO_GND: C803.2 C804.2 C808.2 C812.2 C813.2 C814.2 C815.2 C816.2 C817.2 C820.2 C821.2 C825.2 C826.2 C827.2 J800.1 J801.1 R807.1 R808.1 R809.1 R810.1 R812.1 R813.1 R814.2 R815.2 R816.2 U800.9 U800.14 U800.17 U800.22 U800.33 | length 35.1
  Top Layer LF-Signals w0.15: U800.14@-78.45,-108.275 U800.33@-77.1,-108.275 ; U800.9@-78.45,-106.275 -77.8,-106.275 v10(-77,-107.075) ; U800.22@-75.8,-109.725 v10(-75.8,-108.275)
  Top Layer LF-Signals w0.175: R808.1@-87.725,-117.35 C804.2@-85.95,-117.35 ; R810.1@-84.65,-110.4 R809.1@-84.65,-109.25 ; C825.2@-81.175,-102.977 C826.2@-80.223,-102.977 ; C814.2@-80.85,-107.8 C815.2@-80.85,-106.7 ; C826.2@-79.975,-103.225 C827.2@-78.85,-103.225 ; C816.2@-79.674,-112.502 C817.2@-79.674,-111.55 ; C803.2@-78.85,-117.35 R807.1@-77.075,-117.35 -77.075,-118.475 -76.575,-118.975 J800.1@-76.575,-122.075 ; U800.17@-77.8,-109.725 -77.8,-109.075 v10(-77,-108.275) ; C820.2@-72.95,-111.975 C821.2@-72.95,-110.875 ; C812.2@-72.15,-117.45 R812.1@-72.15,-116.125 ; C813.2@-64.975,-117.45 R813.1@-64.975,-116.125
  Top Layer LF-Signals w0.3: R814.2@-83.875,-106.4 v3(-82.025,-106.4)
  Bottom Layer LF-Signals w0.3: v3(-82.025,-106.4) -80.15,-108.275 v10(-77,-108.275) v10(-75.8,-108.275) v10(-75.8,-107.075) v10(-77,-107.075)
AUDIO_MICBIAS: C811.1 R803.2 R804.2 U800.20 | length 13
  Top Layer LF-Signals w0.175: C811.1@-76.6,-112.002 v1(-76.6,-110.863) U800.20@-76.6,-109.725 ; v3(-69.225,-112.3) R803.2@-69.225,-113.7 R804.2@-67.9,-113.7
  Signal Layer 2 w0.175: v1(-76.6,-110.863) -75.926,-111.538 -69.987,-111.538 v3(-69.225,-112.3)
AUDIO_MICVDD: C816.1 C817.1 L804.2 U800.19 | length 5.4
  Top Layer LF-Signals w0.175: L804.2@-78.034,-114.473 L804.2@-78.034,-114.3 -78.325,-114.009 C816.1@-78.325,-112.75 -78.277,-112.701 C817.1@-78.277,-111.55 -77.426,-110.7 -77.425,-110.7 -77,-110.275 U800.19@-77,-109.725
  other v3: -77.665,-110.95
BA0: R262.2 U601.M1 | length 45
  Top Layer LF-Signals w0.179: U601.M1@-51.972,-72.925 v4(-51.397,-72.925)
  Signal Layer 1 w0.155: v4(-51.397,-72.925) -52.228,-73.756 -53.386,-73.756 -54.352,-74.722 -56.647,-74.722 -57.005,-75.08 -57.3,-75.08 -59.067,-73.312 -59.067,-62.24 -55.23,-58.402 -55.23,-51.478 -52.212,-48.461 -49.873,-48.461 -49.579,-48.756 -49.579,-50.785 v3(-50.794,-52)
  Bottom Layer LF-Signals w0.179: R262.2@-51.767,-52 v3(-50.794,-52)
CANH: J1000.1@-60.35,-132.945 R1000.2 U1000.7 | length 21.5
  Top Layer LF-Signals w0.175: J1000.1@-60.35,-132.945 -56.37,-132.945 -52.305,-128.88 R1000.2@-52.305,-127.3 -51.63,-127.3 -50.475,-126.145 -50.475,-122.49 -51.585,-121.38 -53.25,-121.38 -53.625,-121.005 U1000.7@-53.625,-120.492
CANL: J1000.2@-60.35,-130.405 R1001.1 U1000.6 | length 15.6
  Top Layer LF-Signals w0.175: J1000.2@-60.35,-130.405 -57.245,-127.3 R1001.1@-56.28,-127.3 ; R1001.1@-55.605,-127.3 R1001.1@-56.28,-127.3 ; U1000.6@-54.275,-120.492 -54.275,-121.005 -54.65,-121.38 -56.325,-121.38 -57.45,-122.505 -57.45,-126.13 R1001.1@-56.28,-127.3
CAP_CHARGE_EN: pad.0@-62.05,-5.875 Q102.1 R137.1 U105.4 | length 17.1
  Signal Layer 2 w0.18: v1(-68.875,-11.275) -68.875,-8.247 v1(-65.041,-4.413)
  Bottom Layer LF-Signals w0.18: v1(-68.875,-11.275) -68.875,-12.453 U105.4@-68.865,-12.463 ; R137.1@-67.05,-4.021 -66.503,-4.021 -66.111,-4.413 v1(-65.041,-4.413) -63.579,-5.875 pad.0@-62.05,-5.875 -62.05,-7.02 -62.298,-7.268 Q102.1@-62.168,-7.398
CAS: R263.2 U601.K7 | length 35.5
  Top Layer LF-Signals w0.179: v4(-57.05,-74.5) -56.775,-74.225 U601.K7@-55.872,-74.225
  Signal Layer 1 w0.155: v4(-57.05,-74.5) -56.857,-74.307 -55.334,-74.307 -54.824,-73.797 -54.291,-73.797 -52.686,-72.192 -51.124,-72.192 -50.936,-72.004 -50.936,-69.638 -51.938,-68.636 -51.938,-67.226 -51.633,-66.921 -51.633,-61.663 -48.263,-58.293 v3(-48.263,-57.644)
  Bottom Layer LF-Signals w0.179: v3(-48.263,-57.644) -47.655,-58.251 R263.2@-37.843,-58.251 R263.2@-37.771,-58.251
D0: R235.2 R628.2 R629.1 | length 47.6
  Top Layer LF-Signals w0.179: v1(-56.005,-82.777) R629.1@-55.222,-82.777
  Signal Layer 1 w0.155: v1(-56.005,-82.777) -55.994,-82.766 -55.994,-77.918 -59.372,-74.54 -59.372,-62.113 -59.367,-62.108 -59.367,-62.054 -55.633,-58.32 -55.633,-46.746 -54.089,-45.202 -52.355,-45.202 v3(-50.855,-46.702)
  Bottom Layer LF-Signals w0.179: R628.2@-56.848,-82.777 v1(-56.005,-82.777) ; R235.2@-51.767,-46.702 v3(-50.855,-46.702)
D0_LCD: J404.3 pad.686 R628.1 | length 39.1
  Top Layer LF-Signals w0.179: J404.3@-86.136,-68.086 J404.3@-86.15,-68.1 -84.739,-68.1 -82.329,-70.511 -82.329,-74.286 v1(-83.042,-75)
  Bottom Layer LF-Signals w0.179: v1(-83.042,-75) -82.194,-75.849 -66.657,-75.849 -63.693,-78.813 -63.693,-80.276 -61.935,-82.034 pad.686@-61.162,-82.034 -60.419,-82.777 R628.1@-57.848,-82.777 R628.1@-58.014,-82.611
D1: R236.2 R627.2 R630.1 | length 20.9
  Top Layer LF-Signals w0.179: R630.1@-58.986,-79.911 v1(-59.769,-79.911) -61.608,-78.072 -61.608,-70.797 -61.6,-70.789 -61.6,-70.592 -55.507,-64.499 -55.309,-64.499 R236.2@-55.111,-64.3
  Bottom Layer LF-Signals w0.179: R627.2@-60.658,-79.911 v1(-59.769,-79.911)
D1_LCD: J404.4 pad.687 R627.1 | length 31.6
  Top Layer LF-Signals w0.179: J404.4@-86.15,-68.6 -85.006,-68.6 -83.042,-70.564 v1(-83.042,-73.908)
  Bottom Layer LF-Signals w0.179: v1(-83.042,-73.908) -81.431,-75.52 -66.52,-75.52 -63.02,-79.02 pad.687@-63.02,-79.905 R627.1@-61.665,-79.905
D2: R237.2 R626.2 R631.1 | length 20.5
  Top Layer LF-Signals w0.179: R631.1@-58.986,-79.119 v1(-59.769,-79.119) -61.279,-77.609 -61.279,-70.934 -61.271,-70.926 -61.271,-70.728 -55.569,-65.026 -54.85,-65.026 R237.2@-54.124,-64.3
  Bottom Layer LF-Signals w0.179: R626.2@-60.665,-79.1 -60.646,-79.119 v1(-59.769,-79.119)
D2_LCD: J404.5 pad.681 R626.1 | length 30.8
  Top Layer LF-Signals w0.179: J404.5@-86.15,-69.114 J404.5@-86.15,-69.1 -85.088,-69.1 -84.034,-70.154 v1(-84.034,-73.353)
  Bottom Layer LF-Signals w0.179: v1(-84.034,-73.353) pad.681@-82.203,-73.353 -81.817,-73.739 -81.817,-74.143 -80.768,-75.191 -66.384,-75.191 -62.475,-79.1 R626.1@-61.665,-79.1
D3: R238.2 R625.2 R632.1 | length 20.4
  Top Layer LF-Signals w0.179: R632.1@-58.986,-78.327 v1(-59.769,-78.327) -60.95,-77.146 -60.95,-71.07 -60.942,-71.062 -60.942,-70.864 -55.498,-65.421 -54.258,-65.421 R238.2@-53.137,-64.3
  Bottom Layer LF-Signals w0.179: R625.2@-60.442,-78.119 -60.649,-78.325 -60.648,-78.327 v1(-59.769,-78.327)
D3_LCD: J404.6 pad.680 R625.1 | length 30.9
  Top Layer LF-Signals w0.179: v4(-87.274,-69.6) J404.6@-86.15,-69.6
  Bottom Layer LF-Signals w0.179: v4(-87.274,-69.6) -86.65,-69.6 -86.149,-70.101 -86.149,-71.119 -85.668,-71.6 -83.179,-71.6 -82.854,-71.925 pad.680@-82.075,-71.925 -80.915,-71.925 -77.978,-74.862 -66.233,-74.862 -62.794,-78.301 -62.787,-78.295 R625.1@-61.665,-78.295
D4: R239.2 R624.2 R633.1 | length 33.1
  Top Layer LF-Signals w0.179: v3(-57.436,-65.581) -57.436,-65.963 -61.929,-70.455 -61.929,-70.469 -61.937,-70.477 -61.937,-78.644 -60.021,-80.56 -59.239,-80.56 -56.24,-83.56 v1(-54.355,-83.56) R633.1@-54.355,-82.777 ; v1(-52.151,-65.581) R239.2@-52.151,-64.3
  Bottom Layer LF-Signals w0.179: v3(-57.436,-65.581) -57.005,-65.151 -52.581,-65.151 v1(-52.151,-65.581) ; v1(-54.355,-83.56) -54.355,-84.411 R624.2@-54.35,-84.416
D4_LCD: J404.8 pad.685 R624.1 | length 40.8
  Top Layer LF-Signals w0.179: J404.8@-86.15,-70.6 -84.817,-70.6 -84.553,-70.864 -84.553,-74.024 v1(-83.981,-74.596)
  Bottom Layer LF-Signals w0.179: v1(-83.981,-74.596) -83.637,-74.939 -83.637,-75.177 -82.637,-76.178 -66.833,-76.178 -64.022,-78.989 -64.022,-80.498 pad.685@-60.797,-83.723 -59.104,-85.416 R624.1@-54.35,-85.416
D5: R240.2 R623.2 R634.1 | length 30.9
  Top Layer LF-Signals w0.179: R634.1@-58.986,-77.534 v1(-59.769,-77.534) -59.769,-77.47 -60.613,-76.626 -60.613,-71.263 v3(-55.45,-66.1) ; v5(-45.75,-66.4) -45.75,-66.774 -45.209,-67.315 -44.476,-67.315 -43.25,-66.088 R240.2@-43.25,-64.3
  Bottom Layer LF-Signals w0.179: R623.2@-60.665,-77.49 -60.62,-77.534 R623.2@-60.596,-77.534 ; R623.2@-60.641,-77.579 R623.2@-60.596,-77.534 ; v1(-59.769,-77.534) R623.2@-60.596,-77.534 ; v3@-55.2,-66.102 -55.218,-66.099 -51.169,-66.099 -50.967,-65.898 -46.252,-65.898 v5(-45.75,-66.4)
D5_LCD: J404.9 pad.679 R623.1 | length 27.1
  Top Layer LF-Signals w0.179: J404.9@-86.15,-71.1 v4(-85.026,-71.1)
  Bottom Layer LF-Signals w0.179: v4(-85.026,-71.1) pad.679@-81.05,-71.1 -77.617,-74.533 -66.097,-74.533 -63.133,-77.496 -63.127,-77.49 R623.1@-61.665,-77.49
D6: R241.2 R622.2 R635.1 | length 26.3
  Top Layer LF-Signals w0.179: R635.1@-58.986,-76.742 v1(-59.769,-76.742) -60.284,-76.228 -60.284,-71.419 -55.489,-66.625 v1(-54.725,-66.625) ; v1(-46.65,-66.625) -46.365,-66.34 -46.365,-66.133 -45.25,-65.018 R241.2@-45.25,-64.3 R241.2@-45.414,-64.465
  Bottom Layer LF-Signals w0.179: R622.2@-60.665,-76.685 -60.607,-76.742 v1(-59.769,-76.742) ; R622.2@-60.641,-76.799 R622.2@-60.621,-76.819 ; v1(-54.725,-66.625) -49.912,-66.625 -49.719,-66.433 -47.951,-66.433 -47.759,-66.625 v1(-46.65,-66.625) v1@-46.498,-66.625
D6_LCD: J404.10 pad.678 R622.1 | length 36.2
  Top Layer LF-Signals w0.179: v4(-87.274,-71.6) J404.10@-86.15,-71.6
  Bottom Layer LF-Signals w0.179: v4(-87.274,-71.6) -87.965,-70.908 -87.965,-67.238 -87.764,-67.036 -84.942,-67.036 pad.678@-83.939,-68.039 -82.452,-68.039 -78.147,-72.344 -67.405,-72.344 -63.058,-76.691 -63.052,-76.685 R622.1@-61.665,-76.685
D7: R242.2 R621.2 R636.1 | length 21.7
  Top Layer LF-Signals w0.179: R636.1@-58.986,-75.95 v1(-59.769,-75.95) -59.769,-71.37 -55.546,-67.147 v1(-54.25,-67.147) ; v3(-48.975,-67.147) R242.2@-48.975,-64.3
  Bottom Layer LF-Signals w0.179: R621.2@-60.665,-75.88 -60.594,-75.95 v1(-59.769,-75.95) ; v1(-54.25,-67.147) v3@-49,-67.147
D7_LCD: J404.11 pad.677 R621.1 | length 39.7
  Top Layer LF-Signals w0.179: J404.11@-86.15,-72.1 v4(-85.026,-72.1)
  Bottom Layer LF-Signals w0.179: v4(-85.026,-72.1) -87.65,-72.1 -88.328,-71.422 -88.328,-67.09 -87.871,-66.634 pad.677@-83.392,-66.634 -78.042,-71.983 -67.153,-71.983 -63.251,-75.886 -63.244,-75.88 R621.1@-61.665,-75.88
D8: R243.2 R620.2 R637.1 | length 69.8
  Top Layer LF-Signals w0.179: R637.1@-48.858,-75.885 v1(-48.075,-75.885)
  Signal Layer 1 w0.155: v3(-60.125,-42.775) -58.707,-42.775 -57.715,-43.767 -57.715,-47.793 -61.395,-51.473 -61.395,-60.457 -61.903,-60.965 -61.903,-83.377 -59.373,-85.907 -52.083,-85.907 -47.546,-81.37 -47.546,-76.414 v1(-48.075,-75.885)
  Bottom Layer LF-Signals w0.179: v3(-60.125,-42.775) R243.2@-59.17,-42.775 ; v1(-48.075,-75.885) -47.216,-75.885 R620.2@-47.21,-75.891
D8_LCD: J404.13 pad.667 R620.1 | length 72.5
  Top Layer LF-Signals w0.179: J404.13@-86.15,-73.1 v4(-85.026,-73.1)
  Bottom Layer LF-Signals w0.179: v4(-85.026,-73.1) -87.812,-73.1 -88.483,-73.771 -88.483,-81.147 -87.528,-82.102 -85.13,-82.102 -82.308,-84.924 pad.667@-77.252,-84.924 -74.826,-87.35 -72.19,-89.986 -57.354,-89.986 -55.635,-88.268 -48.769,-88.268 -43.274,-82.772 -43.274,-78.272 -45.655,-75.891 R620.1@-46.21,-75.891
D9: R244.2 R619.2 R638.1 | length 69.6
  Top Layer LF-Signals w0.179: R638.1@-48.858,-76.69 v1(-48.075,-76.69)
  Signal Layer 1 w0.155: v3@-50.003,-43.6 v3(-49.95,-43.6) -51.939,-41.611 -54.496,-41.611 -54.962,-42.078 -54.962,-45.078 -56.28,-46.396 -56.28,-58.104 -59.982,-61.807 -59.982,-65.738 -60.385,-66.14 -60.385,-81.216 -57.724,-83.877 -55.016,-83.877 -54.72,-84.173 -52.074,-84.173 -50.835,-82.934 -50.835,-79.45 v1(-48.075,-76.69)
  Bottom Layer LF-Signals w0.179: R244.2@-51.762,-43.606 -51.756,-43.6 v3(-49.95,-43.6) ; v1(-48.075,-76.69) -47.216,-76.69 R619.2@-47.21,-76.696
D9_LCD: J404.14 pad.668 R619.1 | length 65
  Top Layer LF-Signals w0.179: v4(-87.274,-73.6) J404.14@-86.15,-73.6
  Bottom Layer LF-Signals w0.179: v4(-87.274,-73.6) -87.564,-73.6 -88.154,-74.19 -88.141,-74.203 -88.141,-78.878 -86.239,-80.78 -84.375,-80.78 -82.327,-82.827 pad.668@-76.78,-82.827 -71.525,-82.827 -71.17,-82.472 -66.901,-82.472 -61.435,-87.939 -48.905,-87.939 -43.603,-82.636 -43.603,-78.78 -45.687,-76.696 R619.1@-46.21,-76.696
D10: R245.2 R618.2 R639.1 | length 74
  Top Layer LF-Signals w0.179: R639.1@-48.858,-77.495 v1(-48.075,-77.495)
  Signal Layer 1 w0.155: v3(-50.855,-44.522) -49.868,-44.522 -49.42,-44.073 -49.42,-43.198 -51.502,-41.116 -54.618,-41.116 -55.4,-41.898 -55.4,-44.727 -57.41,-46.737 -57.41,-47.919 -58.476,-48.985 -58.476,-59.869 -60.287,-61.68 -60.287,-65.611 -60.69,-66.014 -60.69,-83.295 -59.008,-84.978 -52.448,-84.978 -50.53,-83.06 -50.53,-79.95 v1(-48.075,-77.495)
  Bottom Layer LF-Signals w0.179: R245.2@-51.767,-44.522 v3(-50.855,-44.522) ; v1(-48.075,-77.495) -47.216,-77.495 R618.2@-47.21,-77.501
D10_LCD: J404.15 pad.669 R618.1 | length 64.4
  Top Layer LF-Signals w0.179: J404.15@-86.15,-74.1 v4(-85.026,-74.1)
  Bottom Layer LF-Signals w0.179: v4(-85.026,-74.1) -87.599,-74.1 -87.812,-74.313 -87.812,-78.741 -86.103,-80.451 -84.238,-80.451 -82.882,-81.807 pad.669@-75.436,-81.807 -71.781,-81.807 -71.444,-82.143 -66.764,-82.143 -61.298,-87.61 -49.042,-87.61 -43.932,-82.499 -43.932,-79.232 -45.663,-77.501 R618.1@-46.21,-77.501
D11: R246.2 R617.2 R640.1 | length 53.3
  Top Layer LF-Signals w0.179: v1(-53.489,-83.56) R640.1@-53.489,-82.777
  Signal Layer 1 w0.155: v1(-53.489,-83.56) -54.085,-82.964 -54.865,-82.964 -55.363,-83.461 -56.16,-83.461 -56.886,-82.735 -56.886,-77.458 -59.677,-74.667 -59.677,-61.933 -55.975,-58.23 -55.975,-46.656 -54.216,-44.897 -51.77,-44.897 -50.967,-45.7 v3(-50.05,-45.7)
  Bottom Layer LF-Signals w0.179: v1(-53.489,-83.56) -53.489,-84.411 R617.2@-53.483,-84.416 ; R246.2@-51.767,-45.705 -51.763,-45.7 v3(-50.05,-45.7)
D11_LCD: J404.16 pad.676 R617.1 | length 41.7
  Top Layer LF-Signals w0.179: v4(-87.274,-74.6) J404.16@-86.15,-74.6
  Bottom Layer LF-Signals w0.179: v4(-87.274,-74.6) -84.783,-74.6 -82.307,-77.076 pad.676@-80.967,-77.076 -80.398,-76.507 -67.018,-76.507 -64.351,-79.174 -64.351,-81.165 -63.134,-82.381 -63.129,-82.381 -59.546,-85.965 -53.639,-85.965 -53.483,-85.809 R617.1@-53.483,-85.416
D12: R247.2 R616.2 R641.1 | length 52.3
  Top Layer LF-Signals w0.179: v3(-60.2,-52.75) R247.2@-59.3,-52.75 ; R641.1@-48.858,-78.301 v1(-48.075,-78.301)
  Signal Layer 1 w0.155: v3(-60.2,-52.75) -60.2,-52.775 -59.53,-53.445 -59.53,-60.491 -60.592,-61.554 -60.592,-65.485 -60.995,-65.888 -60.995,-83.422 -59.12,-85.297 -52.335,-85.297 -50.225,-83.186 -50.225,-80.451 v1(-48.075,-78.301)